# Altium PCB Lights Board.PcbDoc
Units mm, origin at the board's own origin, x right, y up, seen from the top; angles counter-clockwise.
Board outline 65.69 x 73.15 mm, 2 copper layers (Top Layer, Bottom Layer); 56 components, 45 nets, 265 pads, 55 vias.
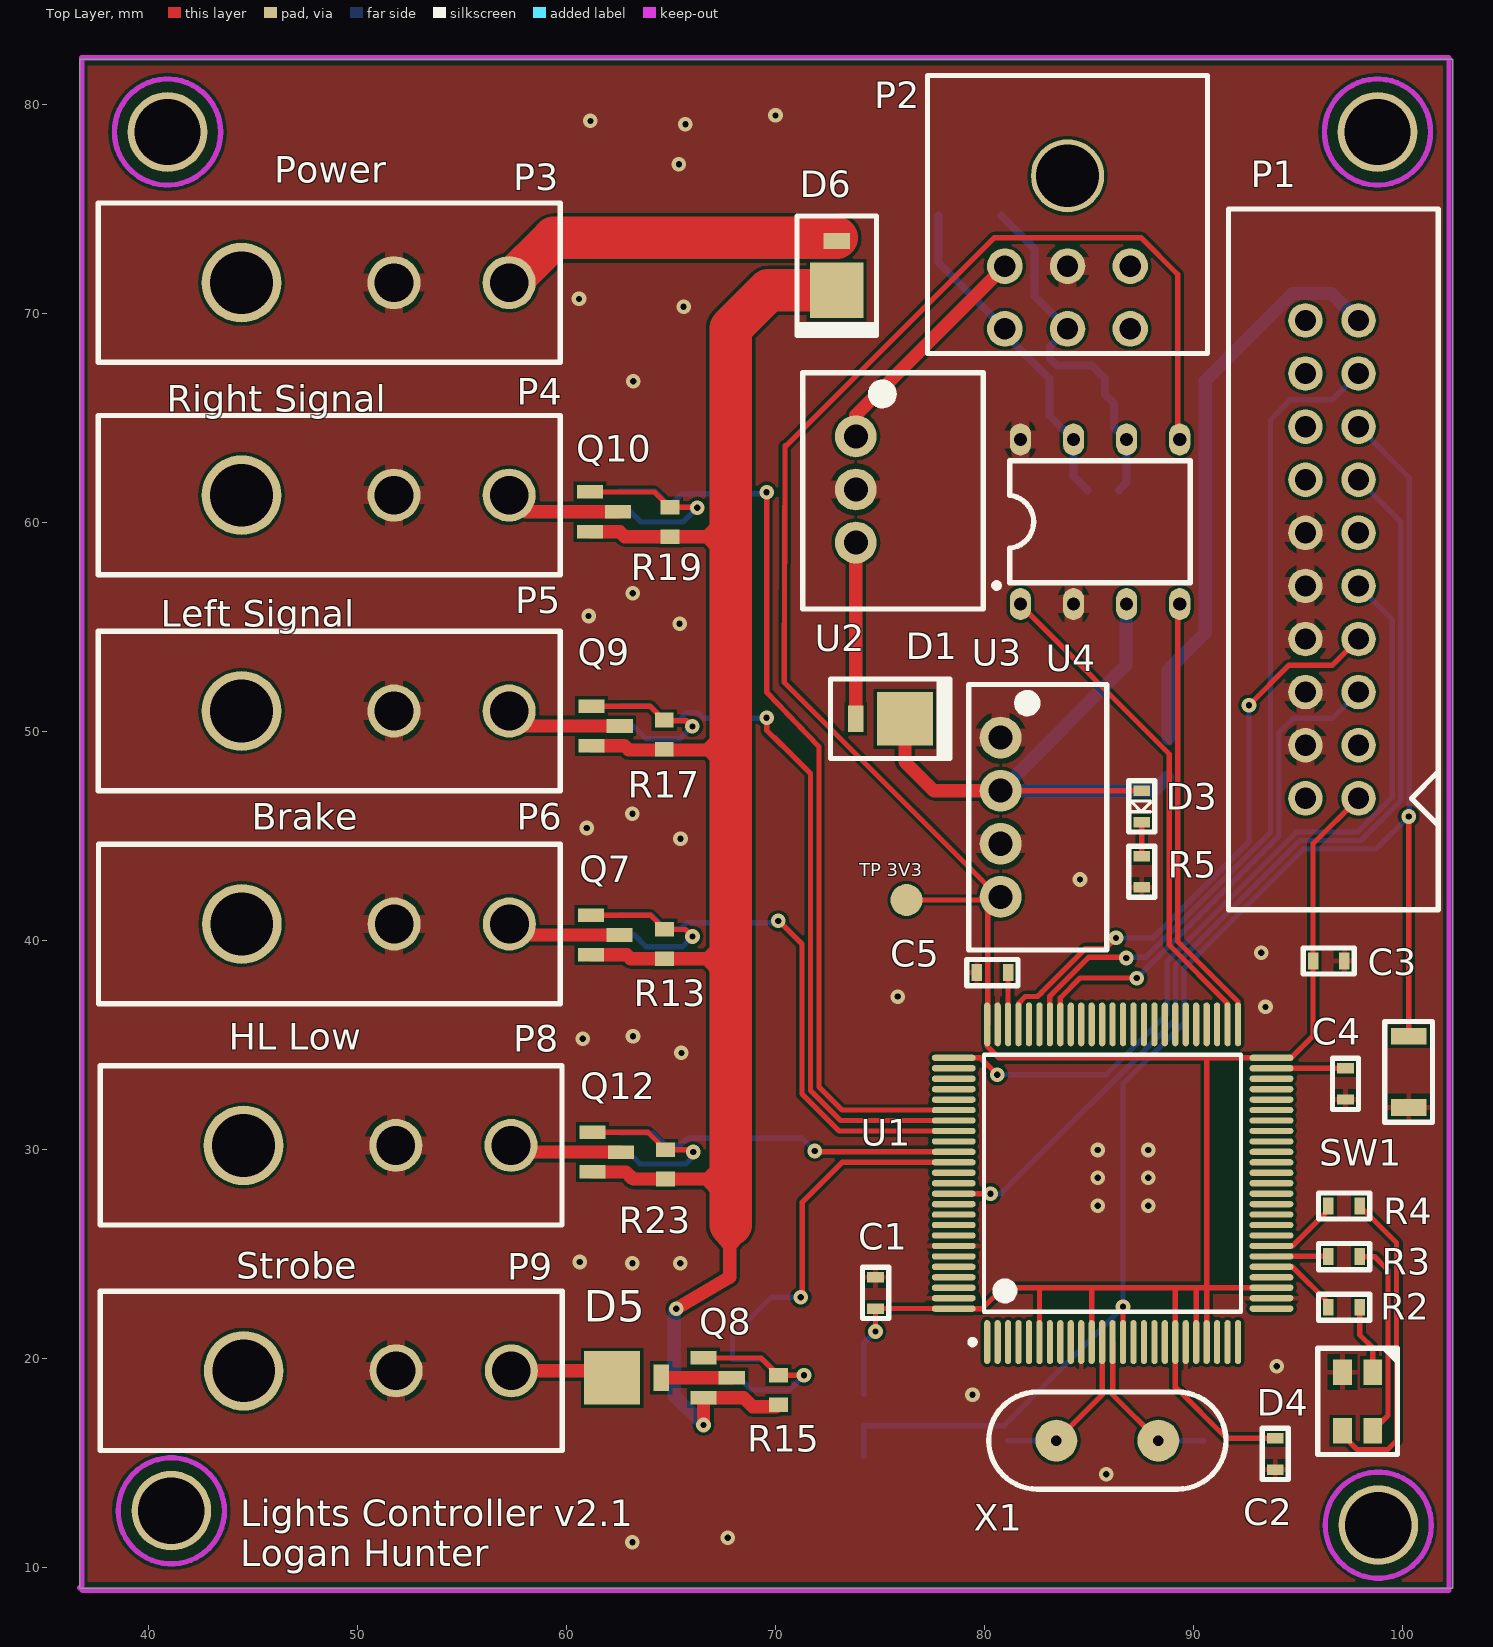
[diagram p0: Top Layer view]
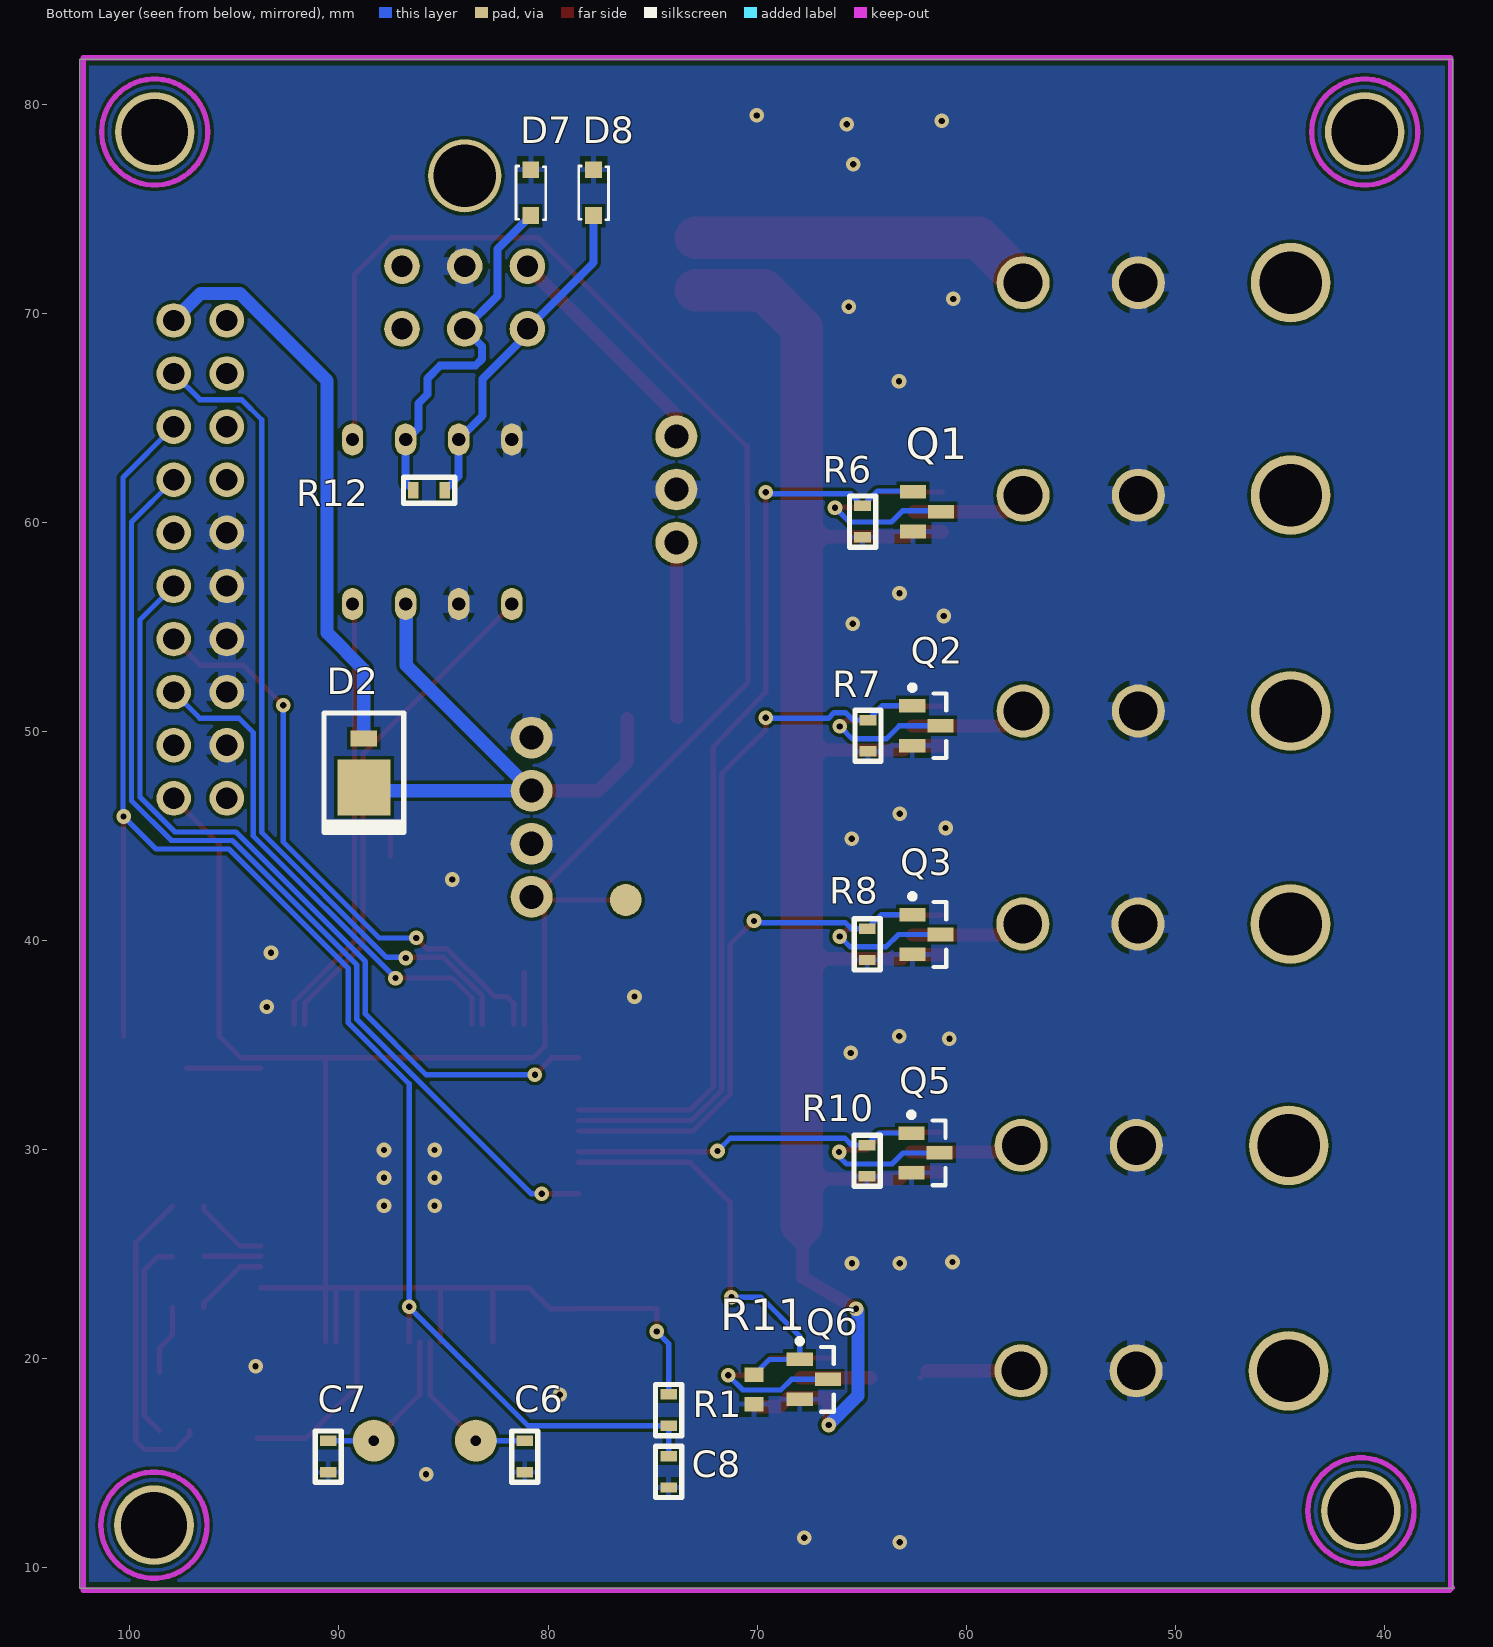
[diagram p1: Bottom Layer view, seen from below]

## Layer stack, top to bottom
Top Solder: solder mask 0.0102, Solder Resist, Dk 3.5
Top Layer: signal copper 0.0356
Dielectric 1: dielectric 0.32, FR-4, Dk 4.8
Bottom Layer: signal copper 0.0356
Bottom Solder: solder mask 0.0102, Solder Resist, Dk 3.5

## Board outline
36.722,82.164 36.722,9.014 102.408,9.014 102.408,82.164

## Design rules (kind name [scope] priority, off if disabled: settings)
BoardOutlineClearance [All] p1: gap=0.3 ignorepadtopadclearanceinfootprint=FALSE
Clearance [All] p1: gap=0.152 ignorepadtopadclearanceinfootprint=FALSE except(0: Arc-Hole Track-Hole SMDPad-Hole THPad-Hole Via-Hole Fill-Hole Poly-Hole Region-Hole Text-Hole)
ComponentClearance [All] p1: gap=0.1 collisioncheckmode=3 verticalgap=0.254 showdistances=FALSE
DiffPairsRouting [All] p1: maxlimit=0.254 minlimit=0.254 mostfreqgap=0.254 toplayer_minwidth=0.381 toplayer_maxwidth=0.381 toplayer_prefwidth=0.381 bottomlayer_minwidth=0.381 bottomlayer_maxwidth=0.381 bottomlayer_prefwidth=0.381 maxuncoupledlength=12.7
FabricationTestPointUsage TestPointUsage [All] p1: valid=0 allowmultiple=FALSE
FabricationTestpoint Testpoint [All] p1: side=3 testpointundercomponent=TRUE minsize=1.016 maxsize=2.54 preferedsize=1.524 minholesize=0 maxholesize=1.016 preferedholesize=0.813 testpointgrid=0.025 allowsidetop=TRUE allowsidebottom=TRUE usegrid=TRUE gridtolerance=0
HoleSize [All] p1: absolutevalues=TRUE maxlimit=6.3 minlimit=0.3 maxpercent=80.000 minpercent=20.000
HoleToHoleClearance [All] p1: gap=0.45 allowstackedmicrovias=TRUE
MinimumAnnularRing [All] p1: minimumring=0.15
MinimumSolderMaskSliver [All] p1: minsoldermaskwidth=0.075
PlaneClearance [All] p1: clearance=0.5
PlaneConnect [All] p1: planeconnectstyle=Direct reliefexpansion=0.508 reliefentries=4 reliefconductorwidth=0.254 reliefairgap=0.254
PolygonConnect "GND Via" [isVia AND InNet('GND')] p1: connectstyle=Direct reliefconductorwidth=0.254 reliefentries=4 polygonreliefangle="90 Angle" airgapwidth=0.254 // GND Via Connection
PolygonConnect [All] p2: thpad.connectstyle=Relief thpad.reliefconductorwidth=0.889 thpad.reliefentries=4 thpad.polygonreliefangle="90 Angle" thpad.airgapwidth=0.25 smdpad.connectstyle=Relief smdpad.reliefconductorwidth=0.254 smdpad.reliefentries=4 smdpad.polygonreliefangle="90 Angle" smdpad.airgapwidth=0.25 via.connectstyle=Relief via.reliefconductorwidth=0.254 via.reliefentries=4 via.polygonreliefangle="90 Angle" via.airgapwidth=0.25
RoutingVias [All] p1: holewidth=0.3 width=0.6 viastyle="Through Hole" minholewidth=0.3 minwidth=0.6 maxholewidth=6.3 maxwidth=6.6
SilkToSilkClearance [All] p1: silktosilkclearance=0.15
SilkToSolderMaskClearance SilkscreenOverComponentPads [IsPad] p1: minsilkscreentomaskgap=0.25 clearancetoexposedcopper=TRUE
SolderMaskExpansion [All] p1: expansion=0.1
Width [All] p1: maxlimit=3.81 minlimit=0.152 preferedwidth=0.25 minimp=50.000000 maximp=50.000000 favimp=50.000000
19 further rules are at their usual default settings.

## Classes and differential pairs
component class Connectors: D6 D7 D8 P1 P2 P3 P4 P5 P6 P8 P9
component class MCU: C4 C5 C6 C7 C8 D4 R1 R2 R3 R4 SW1 U1 X1
component class Other: Q1 Q2 Q3 Q5 Q6 Q7 Q8 Q9 Q10 Q12 R6 R7 R8 R10 R11 R12 R13 R15 R17 R19 R23 U4
component class Power: C1 C2 C3 D1 D2 D3 U2 U3
differential pair CAN2: +CAN2_P -CAN2_N

## Components (designator, comment, footprint, x,y, rotation, side; value= is the part's Value field where it differs from the comment)
C1 "SCH_GENERIC_CAPACITOR_0603" PCB_GENERIC_SMD_0603#1 74.799,23.15 r270 top
C2 "SCH_GENERIC_CAPACITOR_0603" PCB_GENERIC_SMD_0603#1 93.92,15.446 r90 top
C3 "SCH_GENERIC_CAPACITOR_0603" PCB_GENERIC_SMD_0603#1 96.482,39.026 r180 top
C4 "SCH_GENERIC_CAPACITOR_0603" PCB_GENERIC_SMD_0603#1 97.283,33.15 r90 top
C5 "SCH_GENERIC_CAPACITOR_0603" PCB_GENERIC_SMD_0603#1 80.389,38.472 r0 top
C6 "SCH_GENERIC_CAPACITOR_0603" PCB_GENERIC_SMD_0603#1 81.111,15.32 r90 bottom
C7 "SCH_GENERIC_CAPACITOR_0603" PCB_GENERIC_SMD_0603#1 90.515,15.32 r90 bottom
C8 "SCH_GENERIC_CAPACITOR_0603" PCB_GENERIC_SMD_0603#1 74.229,14.587 r270 bottom
D1 "Schottky Diode" "ON Semi Schottky Diode - MBRM110LT1G"#1 74.553,50.615 r180 top
D2 "Schottky Diode" "ON Semi Schottky Diode - MBRM110LT1G"#1 88.809,48.981 r90 bottom
D3 "Red LED" SMD_0603_LED 87.579,46.424 r270 top
D4 "TriColourLED" "TricolourLED - SunLED - DK  1497-1225-2-ND" 97.865,17.953 r90 top
D5 "Schottky Diode" "ON Semi Schottky Diode - MBRM110LT1G"#2 62.899,19.088 r0 top
D6 "Schottky Diode" "ON Semi Schottky Diode - MBRM110LT1G"#1 72.943,72.766 r90 top
D7 "TVS Diode" "TVS Diode" 80.819,75.786 r0 bottom
D8 "TVS Diode" "TVS Diode" 77.819,75.786 r0 bottom
P1 "SWD/VCOM Header" "Samtec TST-110-01-G-D" 97.906,69.67 r270 top
P2 "SCH_MLX_MICROFIT_3X2" PCB_MLX_MICROFIT_3X2 83.985,76.588 r180 top
P3 "Molex Mini-Fit 1x2" "Molex Mini-Fit Jr 2x1" 44.47,71.477 r270 top
P4 "Molex Mini-Fit 1x2" "Molex Mini-Fit Jr 2x1" 44.47,61.311 r270 top
P5 "Molex Mini-Fit 1x2" "Molex Mini-Fit Jr 2x1" 44.47,50.988 r270 top
P6 "Molex Mini-Fit 1x2" "Molex Mini-Fit Jr 2x1" 44.481,40.798 r270 top
P8 "Molex Mini-Fit 1x2" "Molex Mini-Fit Jr 2x1" 44.562,30.203 r270 top
P9 "Molex Mini-Fit 1x2" "Molex Mini-Fit Jr 2x1" 44.573,19.421 r270 top
Q1 "NMOS" "NMOS - SSM3K333R - SOTFL95P180X88-3M" 61.869,60.523 r180 bottom
Q2 "NMOS" "NMOS - SSM3K333R - SOTFL95P180X88-3M" 61.898,50.28 r180 bottom
Q3 "NMOS" "NMOS - SSM3K333R - SOTFL95P180X88-3M" 61.894,40.294 r180 bottom
Q5 "NMOS" "NMOS - SSM3K333R - SOTFL95P180X88-3M" 61.941,29.845 r180 bottom
Q6 "NMOS" "NMOS - SSM3K333R - SOTFL95P180X88-3M" 67.284,19.015 r180 bottom
Q7 "PMOS" "NMOS - SSM3K333R - SOTFL95P180X88-3M" 61.869,40.269 r0 top
Q8 "PMOS" "NMOS - SSM3K333R - SOTFL95P180X88-3M" 67.246,19.088 r0 top
Q9 "PMOS" "NMOS - SSM3K333R - SOTFL95P180X88-3M" 61.885,50.27 r0 top
Q10 "PMOS" "NMOS - SSM3K333R - SOTFL95P180X88-3M" 61.811,60.517 r0 top
Q12 "PMOS" "NMOS - SSM3K333R - SOTFL95P180X88-3M" 61.941,29.886 r0 top
R1 "SCH_GENERIC_RESISTOR_0603" PCB_GENERIC_SMD_0603#1 74.229,17.543 r90 bottom
R2 "SCH_GENERIC_RESISTOR_0603" PCB_GENERIC_SMD_0603#1 97.216,22.464 r0 top
R3 "SCH_GENERIC_RESISTOR_0603" PCB_GENERIC_SMD_0603#1 97.216,24.884 r0 top
R4 "SCH_GENERIC_RESISTOR_0603" PCB_GENERIC_SMD_0603#1 97.216,27.305 r0 top
R5 "SCH_GENERIC_RESISTOR_0603" PCB_GENERIC_SMD_0603#1 87.532,43.295 r270 top
R6 "SCH_GENERIC_RESISTOR_0603" PCB_GENERIC_SMD_0603#1 64.95,60.05 r270 bottom
R7 "SCH_GENERIC_RESISTOR_0603" PCB_GENERIC_SMD_0603#1 64.691,49.803 r270 bottom
R8 "SCH_GENERIC_RESISTOR_0603" PCB_GENERIC_SMD_0603#1 64.727,39.825 r270 bottom
R10 "SCH_GENERIC_RESISTOR_0603" PCB_GENERIC_SMD_0603#1 64.736,29.47 r270 bottom
R11 "SCH_GENERIC_RESISTOR_0603" PCB_GENERIC_SMD_0603#2 70.152,18.529 r270 bottom
R12 "SCH_GENERIC_RESISTOR_0603" PCB_GENERIC_SMD_0603#1 85.688,61.545 r180 bottom
R13 "SCH_GENERIC_RESISTOR_0603" PCB_GENERIC_SMD_0603#2 64.703,39.837 r90 top
R15 "SCH_GENERIC_RESISTOR_0603" PCB_GENERIC_SMD_0603#2 70.158,18.505 r90 top
R17 "SCH_GENERIC_RESISTOR_0603" PCB_GENERIC_SMD_0603#2 64.691,49.853 r90 top
R19 "SCH_GENERIC_RESISTOR_0603" PCB_GENERIC_SMD_0603#2 64.973,60.028 r90 top
R23 "SCH_GENERIC_RESISTOR_0603" PCB_GENERIC_SMD_0603#2 64.744,29.295 r90 top
SW1 "Reset Switch" "Push Button Switch" 100.305,33.722 r270 top
U1 "STM32F407VGT6" STM-LQFP100_M 86.141,28.395 r90 top
U2 "R78E-1.0 DC/DC" R78-1.0 73.857,61.584 r270 top
U3 "RECOM RO Series" "RECOM RO Series 1W DCDC" 80.785,49.715 r270 top
U4 "MCP2562" MCP2562 85.541,60.039 r90 top
X1 "XTAL" CRYSTAL_8MHZ 85.892,16.082 r0 top

## Footprints (in the part's own frame and the unit in brackets; to place one, negate y for a bottom-side part, rotate by r counter-clockwise, add the part's x,y. Pads: shape width x height; smd on the part's side, far side on the other; paste and mask are expansions set on the pad)
CRYSTAL_8MHZ [mm] "631-1100-ND"
  round 2 hole 0.5: 1(-2.44,0) 2(2.44,0)
  silkscreen extent -5.68,-2.32 5.68,2.32, body extent -5.59,-1.85 5.59,1.85, height 3.6
MCP2562 [mil]
  oval 60x40 hole 25: 1(-155,150) 2(-155,50) 3(-155,-50) 4(-155,-150) 5(155,-150) 6(155,-50) 7(155,50) 8(155,150)
  silkscreen extent -125,-170 115,200, body extent -115,-170 115,170, height 210
"Molex Mini-Fit Jr 2x1" [mil]
  round 100 hole 73: 1(0,287) 2(0,504)
  round 150 hole 118: ""(0,0)
  silkscreen extent -150,-270 150,600, body extent -111,-260 117,525, height 449
"NMOS - SSM3K333R - SOTFL95P180X88-3M" [mm] "SOTFL, 3-Leads, Body 2.90x1.80mm, Pitch 0.95mm, IPC Low Density"
  rect 1.25x0.65 smd: 1(-0.675,0.95) 2(-0.675,-0.95) 3(0.675,0)
  body extent -0.95,-1.55 0.95,1.55, height 0.88
"ON Semi Schottky Diode - MBRM110LT1G"#1 [mil]
  rect 105x100 smd: 1(-65,0)
  rect 30x50 smd: 2(27.5,0)
  silkscreen extent -150,-75 75,75, body extent -115,-65 0,65, height 40
"ON Semi Schottky Diode - MBRM110LT1G"#2 [mil]
  rect 105.12x100 smd: 1(-27.56,0)
  rect 30x50 smd: 2(64.94,0)
  body extent -78,-65 37,65, height 40
PCB_GENERIC_SMD_0603#1 [mm]
  rect 0.5x0.8 smd: 1(-0.75,0) 2(0.75,0)
  silkscreen extent -1.22,-0.63 1.22,0.63, body extent -0.75,-0.5 0.75,0.5, height 0.45
PCB_GENERIC_SMD_0603#2 [mm]
  rect 0.7x0.9 smd: 1(-0.7,0) 2(0.7,0)
  body extent -0.85,-0.45 0.85,0.45, height 0.55
PCB_MLX_MICROFIT_3X2 [mm]
  round 1.7 hole 1.02: 1(3,4.32) 2(0,4.32) 3(-3,4.32) 4(3,7.32) 5(0,7.32) 6(-3,7.32)
  round 3.5 hole 3: ""(0,0)
  silkscreen extent -6.7,-4.8 6.7,8.5, body extent -6.57,-4.65 6.58,7.59, height 8.83
"Push Button Switch" [mm]
  rect 0.8x1.7 smd: 1(-1.7,0) 2(1.7,0)
  silkscreen extent -2.41,-1.14 2.41,1.14, body extent -2.16,-0.89 2.16,0.89, height 1.6
R78-1.0 [mm]
  round 2 hole 1.15: 1(-2.54,0) 2(0,0) 3(2.54,0)
  silkscreen extent -5.59,-2.54 5.72,6.1, body extent -4.44,-1.59 4.45,5.4, height 10.4
"RECOM RO Series 1W DCDC" [mm] "RO-053.3S"
  round 2 hole 1.15: 1(0,0) 2(2.54,0) 3(5.08,0) 4(7.62,0)
  silkscreen extent -2.54,-1.52 10.16,5.08, body extent -2.41,-1.4 10.03,4.95, height 10
"Samtec TST-110-01-G-D" [mil] "TST-110-01-G-D"
  round 65 hole 40: 1(900,0) 2(900,-100) 3(800,0) 4(800,-100) 5(700,0) 6(700,-100) 7(600,0) 8(600,-100) 9(500,0) 10(500,-100) 11(400,0) 12(400,-100) 13(300,0) 14(300,-100) 15(200,0) 16(200,-100) 17(100,0) 18(100,-100) 19(0,0) 20(0,-100)
  silkscreen extent -210,-245 1110,150, body extent -200,-233 1100,132, height 350
SMD_0603_LED [mm]
  rect 0.5x0.8 smd: 1(-0.747,-0.047) 2(0.753,-0.047)
  silkscreen extent -1.22,-0.67 1.23,0.58, body extent -0.75,-0.55 0.75,0.45, height 0.45
STM-LQFP100_M [mm] "Thin QFP, 100-Leads, Body 14x14mm, Pitch 0.5mm, IPC Low Density"
  oval 2.1x0.3 smd: 1(-7.6,6) 2(-7.6,5.5) 3(-7.6,5) 4(-7.6,4.5) 5(-7.6,4) 6(-7.6,3.5) 7(-7.6,3) 8(-7.6,2.5) 9(-7.6,2) 10(-7.6,1.5) 11(-7.6,1) 12(-7.6,0.5) 13(-7.6,0) 14(-7.6,-0.5) 15(-7.6,-1) 16(-7.6,-1.5) 17(-7.6,-2) 18(-7.6,-2.5) 19(-7.6,-3) 20(-7.6,-3.5) 21(-7.6,-4) 22(-7.6,-4.5) 23(-7.6,-5) 24(-7.6,-5.5) 25(-7.6,-6) 51(7.6,-6) 52(7.6,-5.5) 53(7.6,-5) 54(7.6,-4.5) 55(7.6,-4) 56(7.6,-3.5) 57(7.6,-3) 58(7.6,-2.5) 59(7.6,-2) 60(7.6,-1.5) 61(7.6,-1) 62(7.6,-0.5) 63(7.6,0) 64(7.6,0.5) 65(7.6,1) 66(7.6,1.5) 67(7.6,2) 68(7.6,2.5) 69(7.6,3) 70(7.6,3.5) 71(7.6,4) 72(7.6,4.5) 73(7.6,5) 74(7.6,5.5) 75(7.6,6)
  oval 0.3x2.1 smd: 26(-6,-7.6) 27(-5.5,-7.6) 28(-5,-7.6) 29(-4.5,-7.6) 30(-4,-7.6) 31(-3.5,-7.6) 32(-3,-7.6) 33(-2.5,-7.6) 34(-2,-7.6) 35(-1.5,-7.6) 36(-1,-7.6) 37(-0.5,-7.6) 38(0,-7.6) 39(0.5,-7.6) 40(1,-7.6) 41(1.5,-7.6) 42(2,-7.6) 43(2.5,-7.6) 44(3,-7.6) 45(3.5,-7.6) 46(4,-7.6) 47(4.5,-7.6) 48(5,-7.6) 49(5.5,-7.6) 50(6,-7.6) 76(6,7.6) 77(5.5,7.6) 78(5,7.6) 79(4.5,7.6) 80(4,7.6) 81(3.5,7.6) 82(3,7.6) 83(2.5,7.6) 84(2,7.6) 85(1.5,7.6) 86(1,7.6) 87(0.5,7.6) 88(0,7.6) 89(-0.5,7.6) 90(-1,7.6) 91(-1.5,7.6) 92(-2,7.6) 93(-2.5,7.6) 94(-3,7.6) 95(-3.5,7.6) 96(-4,7.6) 97(-4.5,7.6) 98(-5,7.6) 99(-5.5,7.6) 100(-6,7.6)
  silkscreen extent -7.72,-6.15 6.15,6.82, body extent -7,-7 7,7, height 1.6
"TricolourLED - SunLED - DK  1497-1225-2-ND" [mm]
  rect 1.2x0.9 smd: 1(1.4,-0.725) 2(-1.4,-0.725) 3(-1.4,0.725) 4(1.4,0.725)
  silkscreen extent -2.54,-1.91 2.54,1.91, body extent -1.84,-1.52 1.84,1.52, height 1.9
"TVS Diode" [mm]
  rect 0.8x0.8 smd: 1(0,1.1) 2(0,-1.1)
  silkscreen extent -0.71,-1.27 0.71,1.3, body extent -0.65,-1.27 0.65,1.27, height 1.04

## Part data
C1: "Generic SMD capacitor 0603", Capacitance=0.33uF
C2 C3: "Generic SMD capacitor 0603", Capacitance=0.33uF, Tolerance=*%
C4 C5: "Generic SMD capacitor 0603", Capacitance=2.2uF, Tolerance=*%
C6 C7: "Generic SMD capacitor 0603", Capacitance=30pF, Tolerance=*%
C8: "Generic SMD capacitor 0603", Capacitance=100nF, Tolerance=*%
D1 D2 D5 D6: library part "ON Semi Schottky Diode - MBRM110LT1G"
D3: library part SMD_0603_LED
D7 D8: Manufacturer=Bourns, Manufacturer ID=CDSOD323-T03SC
Q1 Q2 Q3 Q5 Q6: library part "NMOS - SSM3K333R"
Q7 Q8 Q9 Q10 Q12: library part SSM3J334R,LF(T, "MOSFET (P-Channel)", Manufacturer_Name=Toshiba, RS Part Number=1445260P, Datasheet Link=http://toshiba.semicon-storage.com/info/docget.jsp?did=5579&prodName=SSM3J334R, Height=0.88mm, Manufacturer_Part_Number=SSM3J334R,LF(T, RS Price/Stock=http://uk.rs-online.com/web/p/products/1445260P
R1 R6 R7 R8 R10 R11: "Generic SMD resistor 0603", Resistance=100K
R2: "Generic SMD resistor 0603", Resistance=56R
R3: "Generic SMD resistor 0603", Resistance=5.1R
R4: "Generic SMD resistor 0603", Resistance=0.1R
R5: "Generic SMD resistor 0603", Resistance=150R
R12: "Generic SMD resistor 0603"
R13 R15 R17 R19 R23: "Generic SMD resistor 0603", Resistance=10K
SW1: library part PushButtonSwitch
U1: "ARM Cortex-M4 32-bit MCU+FPU, 210 DMIPS, 1024 kB Flash, 192 kB Internal RAM, 82 I/Os, 100-pin LQFP, -40 to 85 degC, Tray", I/Os (High Current)=82, Manufacturer=STMicroelectronics, Operating Frequency(F) (Processor speed) (MHz)=168, Supplier Part Number 1=497-11605-ND, Supply Voltage(Vcc) max (V)=3.6, Supply Voltage(Vcc) min (V)=1.8, ComponentLink1Description="Manufacturer URL", ComponentLink1URL=http://www.st.com/web/en/home.html, ComponentLink2Description=Datasheet, ComponentLink2URL=http://www.st.com/st-web-ui/static/active/en/resource/technical/document/datasheet/DM00037051.pdf, ComponentLink3Description="Package Specification", ComponentLink3URL=http://www.st.com/st-web-ui/static/active/en/resource/technical/document/data_brief/DM00071938.pdf, Core="ARM Cortex-M4", D/A Converter=2x12-bit, DatasheetVersion="Rev. 4", FLASH Size (Prog) (kB)=1024, Internal RAM Size (kB)=192, Mounting Technology="Surface Mount", PackageDescription="100-Pin Low Profile Quad Flat Package, 14 x 14 mm Body, 0.5 mm Pitch", PackageReference=LQFP100, PackageVersion="Rev. 1, 06/2013", Packing=Tray, PartNumber=STM32F407VGT6, Supplier 1=Digi-Key, Supplier 2=Farnell, Supplier 3=Newark, Supplier 4=Mouser, Supplier Part Number 2=2064368, Supplier Part Number 3=73T2333, Supplier Part Number 4=511-STM32F407VGT6
U2: library part R78E-1.0
U3: library part "RECOM RO Series DCDC Converter"
X1: library part Crystal, Frequency=8MHz

## Free pads (board coordinates)
  round 1.524 all layers, no hole: 1(76.282,41.945)
  round 3.81 hole 3.175: ""(40.928,78.683) ""(41.11,12.728) ""(98.814,78.685) ""(98.851,12.038)

## Via types
v1: diameter 0.7, hole 0.3, Top Layer to Bottom Layer, 55 vias

## Nets (pads, with @x,y where several pads share a name; then routed paths per layer and width w, separated by ;. In a path a pad name is that pad's centre, name@x,y a point inside that pad or via, vN(x,y) a via of type N, cw(c..) or ccw(c..) an arc to the next point about the centre after c; other vN are vias at no path point)
3V3: C1.2 C2.2 C3.2 P1.1 pad.1 R1.2 U1.6 U1.11 U1.19 U1.21 U1.22 U1.28 U1.50 U1.75 U1.100 U3.4 U4.5 | length 153.3
  Top Layer w0.254: 70.465,63.67 70.433,52.356 80.693,42.095 U3.4 U3.4@80.635,41.945 ; 70.493,63.643 80.484,73.634 87.499,73.634 89.256,71.877 U4.5@89.256,64.02 ; v1(74.799,21.302) C1.2 U1.100@78.536,22.4 ; pad.1 U3.4@80.635,41.945 ; U1.100 79.905,22.395 80.905,23.395 82.646,23.395 ; U1.6 82.641,23.389 82.646,23.395 ; U1.11 85.141,23.374 ; 89.141,23.362 U1.19 89.141,18.638 91.582,16.196 C2.2 ; U1.21 90.141,23.378 ; U1.22 90.641,23.395 ; U1.28 90.641,23.395 ; P1.1 95.732,44.636 C3.2 95.732,35.443 94.684,34.395 U1.50 90.606,34.395 ; U3.4@80.635,41.945 80.141,41.451 80.168,41.451 80.168,36.022 U1.75 80.141,34.964 80.71,34.395 90.606,34.395 ; 82.646,23.395 90.641,23.395 ; 90.606,34.395 90.641,34.361 90.641,23.395
  Bottom Layer w0.254: R1.2 74.229,20.731 v1(74.799,21.302)
5V: D1.1 D2.1 D3.1 U3.2 U4.3 | length 33.7
  Top Layer w0.254: U3.2 87.528,47.175 D3.1
  Top Layer w0.635: D1.1 76.204,48.564 77.593,47.175 U3.2
  Bottom Layer w0.635: U4.3@86.716,56.146 86.779,56.083 86.779,53.169 U3.2 88.122,47.175 D2.1@88.766,47.819
"5V - DCDC": D1.2 U2.3 | length 8.5
  Top Layer w0.508: D1.2@73.777,50.624 D1.2@73.857,50.703
  Top Layer w0.635: D1.2@73.857,50.703 U2.3
"5V - DEBUG": D2.2 P1.19 | length 27.4
  Bottom Layer w0.635: D2.2 88.809,52.97 90.568,54.73 90.568,66.785 94.749,70.965 96.61,70.965 P1.19
12V: P2.1 U2.1 | length 11.1
  Top Layer w0.635: U2.1 73.857,65.14 P2.1
"12V - POWER": D6.2 P3.2 | length 16.6
  Top Layer w2.032: P3.2 59.412,73.617 D6.2@72.943,73.617
BE: Q3.1 R8.1 U1.83 | length 24.8
  Top Layer w0.254: v1(70.144,40.944) 70.172,40.944 71.28,39.837 71.28,32.666 73.051,30.895 U1.83
  Bottom Layer w0.254: Q3.1 64.059,41.244 R8.1 65.488,40.575 65.77,40.856 70.056,40.856 v1(70.144,40.944)
BLUE_LED: R4.1 U1.32 | length 3.6
  Top Layer w0.254: U1.32 94.748,25.395 96.466,27.113 R4.1
BRAKE: P6.2 Q7.3 | length 5.5
  Top Layer w0.254: P6.2 P6.2@57.812,40.269
  Top Layer w0.635: P6.2@57.812,40.269 Q7.3
CAN2_N: D7.1 P2.5 R12.1 U4.6 | length 17.4
  Bottom Layer w0.381: D7.1 82.415,73.09 82.415,70.838 P2.5 83.153,68.436 83.153,67.832 83.478,67.507 85.161,67.507 85.769,66.899 85.769,66.137 86.201,65.705 86.201,64.535 U4.6@86.716,64.02 ; R12.1 86.811,61.919 U4.6
CAN2_P: D8.1 P2.4 R12.2 U4.7 | length 16.1
  Bottom Layer w0.381: D8.1 77.819,72.434 P2.4 80.985,69.018 83.131,66.872 83.131,65.116 U4.7 84.271,62.212 R12.2
CAN2_RX: U1.51 U4.4 | length 21.3
  Top Layer w0.254: U4.4@89.256,56.146 89.256,39.962 92.141,37.077 U1.51
CAN2_TX: U1.52 U4.1 | length 24.3
  Top Layer w0.254: U4.1@81.636,56.146 88.85,48.932 88.85,39.793 91.641,37.002 U1.52
ES: Q6.1 R11.1 U1.86 | length 20.3
  Top Layer w0.254: v1@71.288,23.003 71.288,27.482 73.2,29.395 U1.86
  Bottom Layer w0.254: R11.1 69.417,19.965 Q6.1 67.959,21.085 69.813,22.938 71.223,22.938 v1(71.226,22.941) v1@71.288,23.003
GND: C1.1 C2.1 C3.1 C4.1 C5.1 C6.1 C7.1 C8.2 D4.4 D7.2 D8.2 P1.4 P1.6 P1.8 P1.10 P1.12 P2.2 P3.1 P4.1 P5.1 P6.1 P8.1 P9.1 Q1.2 Q2.2 Q3.2 Q5.2 Q6.2 R5.2 R6.2 R7.2 R8.2 R10.2 R11.2 SW1.2 U1.10 U1.20 U1.27 U1.74 U1.94 U1.99 U2.2 U3.1 U3.3 U4.2 U4.8 | length 0.1
  Top Layer w0.254: P6.1@51.759,40.81 P6.1 P6.1@51.851,40.718 ; P8.1 P8.1@51.863,30.192
  other v1: 63.168,11.222 67.735,11.44 85.832,14.475 79.441,18.271 93.989,19.634 63.168,24.563 65.455,24.567 60.648,24.629 85.425,27.324 87.849,27.324 85.425,28.654 87.849,28.654 85.425,29.984 87.849,29.984 65.512,34.629 60.798,35.302 63.197,35.422 93.454,36.83 75.865,37.324 93.25,39.42 84.581,42.926 60.98,45.389 63.168,46.071 65.425,55.16 61.073,55.53 63.184,56.616 63.209,66.765 65.617,70.33 60.616,70.7 65.393,77.139 65.703,79.057 61.159,79.216 70.015,79.481
GREEN_LED: R3.1 U1.31 | length 2.7
  Top Layer w0.254: U1.31 R3.1@96.455,24.895
"Headlights Low": P8.2 Q12.3 | length 5.6
  Top Layer w0.254: P8.2@57.482,30.322 P8.2 P8.2@57.681,29.886 ; Q12.3@62.561,29.83 Q12.3
  Top Layer w0.635: P8.2@57.681,29.886 Q12.3
HLE: Q5.1 R10.1 U1.85 | length 16.6
  Top Layer w0.254: v1@71.806,29.895 U1.85
  Bottom Layer w0.254: Q5.1 64.162,30.795 R10.1 65.474,30.22 65.8,30.546 71.282,30.546 v1(71.891,29.937)
"LEFT SIGNAL": P5.2 Q9.3 | length 5.6
  Top Layer w0.254: P5.2 P5.2@57.989,50.27
  Top Layer w0.635: P5.2@57.989,50.27 Q9.3
LSE: Q2.1 R7.1 U1.82 | length 34.2
  Top Layer w0.254: v1(69.589,50.665) 69.589,50.063 70.276,49.376 ; 69.967,49.718 71.686,47.998 71.686,32.834 73.126,31.395 U1.82
  Bottom Layer w0.254: Q2.1 64.014,51.23 R7.1 65.408,50.553 65.764,50.909 66.311,50.909 66.583,50.637 69.561,50.637 v1(69.589,50.665)
NetC4_2: C4.2 U1.49 | length 3.5
  Top Layer w0.254: U1.49 97.278,33.895 C4.2
NetC5_2: C5.2 U1.73 | length 2.5
  Top Layer w0.254: U1.73 C5.2@81.141,38.471
NetC7_2: C7.2 U1.13 X1.2 | length 7.8
  Top Layer w0.254: U1.13 86.141,18.274 X1.2
  Bottom Layer w0.254: X1.2 90.502,16.082 C7.2
NetD3_2: D3.2 R5.1 | length 1.6
  Top Layer w0.254: R5.1 D3.2
NetD4_1: D4.1 R2.2 | length 3.4
  Top Layer w0.254: R2.2 97.966,21.134 98.59,20.51 D4.1
NetD4_2: D4.2 R3.2 | length 9.6
  Top Layer w0.254: R3.2 98.667,24.884 99.319,24.232 99.319,17.283 D4.2
NetD4_3: D4.3 R4.2 | length 15.2
  Top Layer w0.254: D4.3 97.14,16.347 97.834,15.652 99.305,15.652 99.726,16.073 99.726,25.545 R4.2
NetD5_2: D5.2 Q8.3 | length 3.4
  Top Layer w0.635: D5.2 Q8.3
NetQ1_3: Q1.3 Q10.1 R19.2 | length 11.1
  Top Layer w0.254: Q10.1 64.233,61.467 R19.2 66.255,60.728 v1(66.271,60.712)
  Bottom Layer w0.254: Q1.3@61.171,60.56 63.038,60.56 63.574,60.024 65.588,60.024 66.087,60.523 66.058,60.551 66.218,60.712 v1(66.271,60.712)
NetQ2_3: Q2.3 Q9.1 R17.2 | length 10.5
  Top Layer w0.254: Q9.1 64.013,51.22 64.707,50.526 65.761,50.526 v1(66.038,50.248)
  Bottom Layer w0.254: Q2.3 63.191,50.28 63.814,49.658 65.447,49.658 v1(66.038,50.248)
NetQ3_3: Q3.3 Q7.1 R13.2 | length 10.5
  Top Layer w0.254: Q7.1 64.021,41.219 R13.2 65.702,40.537 v1(66.043,40.196)
  Bottom Layer w0.254: Q3.3 63.241,40.294 63.826,39.709 65.556,39.709 v1(66.043,40.196)
NetQ5_3: Q5.3 Q12.1 R23.2 | length 10.6
  Top Layer w0.254: Q12.1 63.903,30.836 R23.2 65.965,29.995 v1(66.073,29.886)
  Bottom Layer w0.254: Q5.3 63.011,29.845 63.521,29.335 63.521,29.311 65.722,29.311 66.073,29.663 v1(66.073,29.886)
NetQ6_3: Q6.3 Q8.1 R15.2 | length 10.4
  Top Layer w0.254: Q8.1 69.326,20.038 R15.2 v1(71.379,19.205)
  Bottom Layer w0.254: Q6.3 68.354,19.015 68.866,18.503 70.677,18.503 v1(71.379,19.205)
NRST: C8.1 P1.15 R1.1 SW1.1 U1.14 | length 79.3
  Top Layer w0.254: U1.14 v1(86.641,22.482) v1@86.649,22.49 ; v1(100.305,45.938) SW1.1 SW1.1@100.306,35.423
  Bottom Layer w0.254: C8.1 R1.1 80.951,16.793 v1(86.641,22.482) 86.641,33.152 89.553,36.064 89.553,38.667 95.267,44.381 98.749,44.381 100.335,45.967 100.335,62.161 P1.15
RED_LED: R2.1 U1.30 | length 3.6
  Top Layer w0.254: U1.30 94.748,24.395 96.466,22.677 R2.1
"RIGHT SIGNAL": P4.2 Q10.3 | length 5.6
  Top Layer w0.254: P4.2 P4.2@58.065,60.517 ; P4.2@58.384,61.284 P4.2@58.439,61.229
  Top Layer w0.635: P4.2@58.065,60.517 Q10.3
RSE: Q1.1 R6.1 U1.81 | length 44.1
  Top Layer w0.254: v1(69.589,61.458) 69.589,51.89 72.093,49.275 72.093,33.003 73.2,31.895 U1.81
  Bottom Layer w0.254: Q1.1@62.521,61.51 64.24,61.51 R6.1 65.523,61.373 v1@69.589,61.373 ; v1@69.589,61.364 v1@69.589,61.373 ; v1(69.589,61.458) v1@69.589,61.373
SCLK: C6.2 U1.12 X1.1 | length 7.9
  Top Layer w0.254: X1.1 85.641,18.271 U1.12
  Bottom Layer w0.254: C6.2 X1.1@83.439,16.07
Strobe: D5.1 P9.2 | length 5.4
  Top Layer w0.254: P9.2 P9.2@57.709,19.088 ; D5.1@61.865,19.421 D5.1
  Top Layer w0.635: P9.2 D5.1@61.865,19.421
SWCLK: P1.9 U1.76 | length 39.1
  Top Layer w0.254: U1.76 79.817,34.395 v1(80.627,33.585)
  Bottom Layer w0.254: v1(80.627,33.585) 85.834,33.585 88.74,36.491 88.74,39.004 94.93,45.194 97.852,45.194 99.522,46.863 99.522,55.353 P1.9
SWDIO: P1.7 U1.72 | length 28.3
  Top Layer w0.254: U1.72 81.641,37.002 81.963,37.324 82.556,37.324 82.734,37.503 82.734,37.511 84.829,39.606 85.781,39.606 v1(86.305,40.13) ; v1(92.666,51.261) 94.585,53.18 96.656,53.18 P1.7
  Bottom Layer w0.254: v1(86.305,40.13) 88.076,40.13 92.666,44.721 v1(92.666,51.261)
SWO: P1.13 U1.89 | length 46.9
  Top Layer w0.254: U1.89 v1(80.3,27.895)
  Bottom Layer w0.254: v1(80.3,27.895) 80.809,27.895 89.147,36.232 89.147,38.836 95.098,44.788 98.021,44.788 99.928,46.695 99.928,60.027 P1.13
UART1_RX: P1.17 U1.69 | length 40
  Top Layer w0.254: U1.69 83.141,37.343 84.997,39.199 v1@86.762,39.199
  Bottom Layer w0.254: v1@86.762,39.199 87.72,39.199 93.696,45.176 93.696,64.92 94.657,65.881 96.657,65.881 P1.17
  other v1: 86.799,39.169
UART1_TX: P1.5 U1.68 | length 24.5
  Top Layer w0.254: U1.68 83.641,37.268 84.581,38.209 v1(87.293,38.209)
  Bottom Layer w0.254: v1(87.293,38.209) 87.304,38.209 94.102,45.007 94.102,49.952 94.79,50.64 96.656,50.64 P1.5
"VARIABLE OUTPUT VOLTAGE": D6.1 Q7.2 Q8.2 Q9.2 Q10.2 Q12.2 R13.1 R15.1 R17.1 R19.1 R23.1 | length 86.9
  Top Layer w0.635: Q10.2 62.559,59.567 62.798,59.328 R19.1 66.619,59.328 ; Q7.2 62.899,39.319 63.08,39.137 R13.1 66.806,39.137 ; Q9.2 62.795,49.32 62.989,49.126 66.68,49.126 ; Q12.2 62.858,28.936 63.197,28.596 64.742,28.596 R23.1 66.625,28.595 ; v1(65.264,22.385) 67.82,23.9 67.822,25.519 ; v1(66.571,16.83) Q8.2 68.491,18.138 68.928,17.701 70.054,17.701 R15.1
  Top Layer w2.032: 67.869,26.402 67.869,69.306 69.678,71.115 D6.1
  Bottom Layer w0.635: v1(65.264,22.385) 65.172,22.292 65.172,18.23 v1(66.571,16.83)
pads on no net: P1.2 P1.3 P1.11 P1.14 P1.16 P1.18 P1.20 P2. P2.3 P2.6 P3. P4. P5. P6. P8. P9. U1.1 U1.2 U1.3 U1.4 U1.5 U1.7 U1.8 U1.9 U1.15 U1.16 U1.17 U1.18 U1.23 U1.24 U1.25 U1.26 U1.29 U1.33 U1.34 U1.35 U1.36 U1.37 U1.38 U1.39 U1.40 U1.41 U1.42 U1.43 U1.44 U1.45 U1.46 U1.47 U1.48 U1.53 U1.54 U1.55 U1.56 U1.57 U1.58 U1.59 U1.60 U1.61 U1.62 U1.63 U1.64 U1.65 U1.66 U1.67 U1.70 U1.71 U1.77 U1.78 U1.79 U1.80 U1.84 U1.87 U1.88 U1.90 U1.91 U1.92 U1.93 U1.95 U1.96 U1.97 U1.98
copper on no net:
  other v1: 65.472,44.88

## Polygon pours and split planes (outlines as drawn)
GND on Top Layer "Top Layer-GND" (solid, remove dead copper, pour order 2): 36.819,82.245 36.864,82.2 102.231,82.2 102.231,8.916 37.038,8.916 36.819,9.135
GND on Bottom Layer "Bottom Layer-GND" (solid, pour order 4): 36.819,82.245 102.186,82.245 102.231,82.2 102.231,8.916 36.86,8.916

## Keep-outs
Keep-Out Layer:
  circle w0.254: c40.928,78.683 r2.54
  circle w0.254: c98.814,78.685 r2.54
  circle w0.254: c41.11,12.72 r2.54
  circle w0.254: c98.851,12.038 r2.54
  lines w0.254: 102.231,82.2 102.231,63.293 102.231,54.359 ; 102.231,82.245 36.819,82.245 36.819,9.135 36.73,9.046 36.86,8.916 53.084,8.916 85.834,8.916 102.231,8.916 102.231,27.559 102.231,36.493 102.231,54.359 ; 102.231,54.359 102.231,54.359

## Other copper
Top Layer:
  region net "VARIABLE OUTPUT VOLTAGE": 67.805,24.958
  region net "VARIABLE OUTPUT VOLTAGE": 67.805,24.958
  region net "VARIABLE OUTPUT VOLTAGE": 67.805,24.958 67.064,25.822 66.869,26.267 68.869,26.261 68.721,25.874
  region net "VARIABLE OUTPUT VOLTAGE": 66.332,59.328 66.332,59.361 66.912,59.941 66.912,58.693 66.924,58.681
  region net "VARIABLE OUTPUT VOLTAGE": 66.36,49.15 66.36,49.183 66.94,49.763 66.94,48.515 66.952,48.503
  region net "VARIABLE OUTPUT VOLTAGE": 66.332,39.12 66.332,39.154 66.912,39.734 66.912,38.486 66.924,38.474
  region net "VARIABLE OUTPUT VOLTAGE": 66.332,28.56 66.332,28.593 66.912,29.173 66.912,27.925 66.924,27.913
  region net "VARIABLE OUTPUT VOLTAGE": 68.026,25.147
  region net "VARIABLE OUTPUT VOLTAGE": 66.863,26.273 66.875,26.261 68.869,26.261
  region net "VARIABLE OUTPUT VOLTAGE": 67.775,24.895
  region net "VARIABLE OUTPUT VOLTAGE": 68.066,38.687

## Silkscreen, mask and mechanical layers (free items; w line width, h text height)
Top Overlay:
  text "Power" at 46.029,76.256 h1.27
  text "Right Signal" at 40.899,65.312 h1.27
  text "Left Signal" at 40.593,55.023 h1.27
  text "Brake" at 44.955,45.295 h1.27
  text "TP 3V3" at 74.025,43.073 h0.64
  text "HL Low" at 43.869,34.78 h1.27
  text "Strobe" at 44.225,23.823 h1.27
  text "Lights Controller v2.1 / Logan Hunter" at 44.415,10.079 h1.27